# EAGLE board Transmitter PCB (EAGLE 9.6.2)
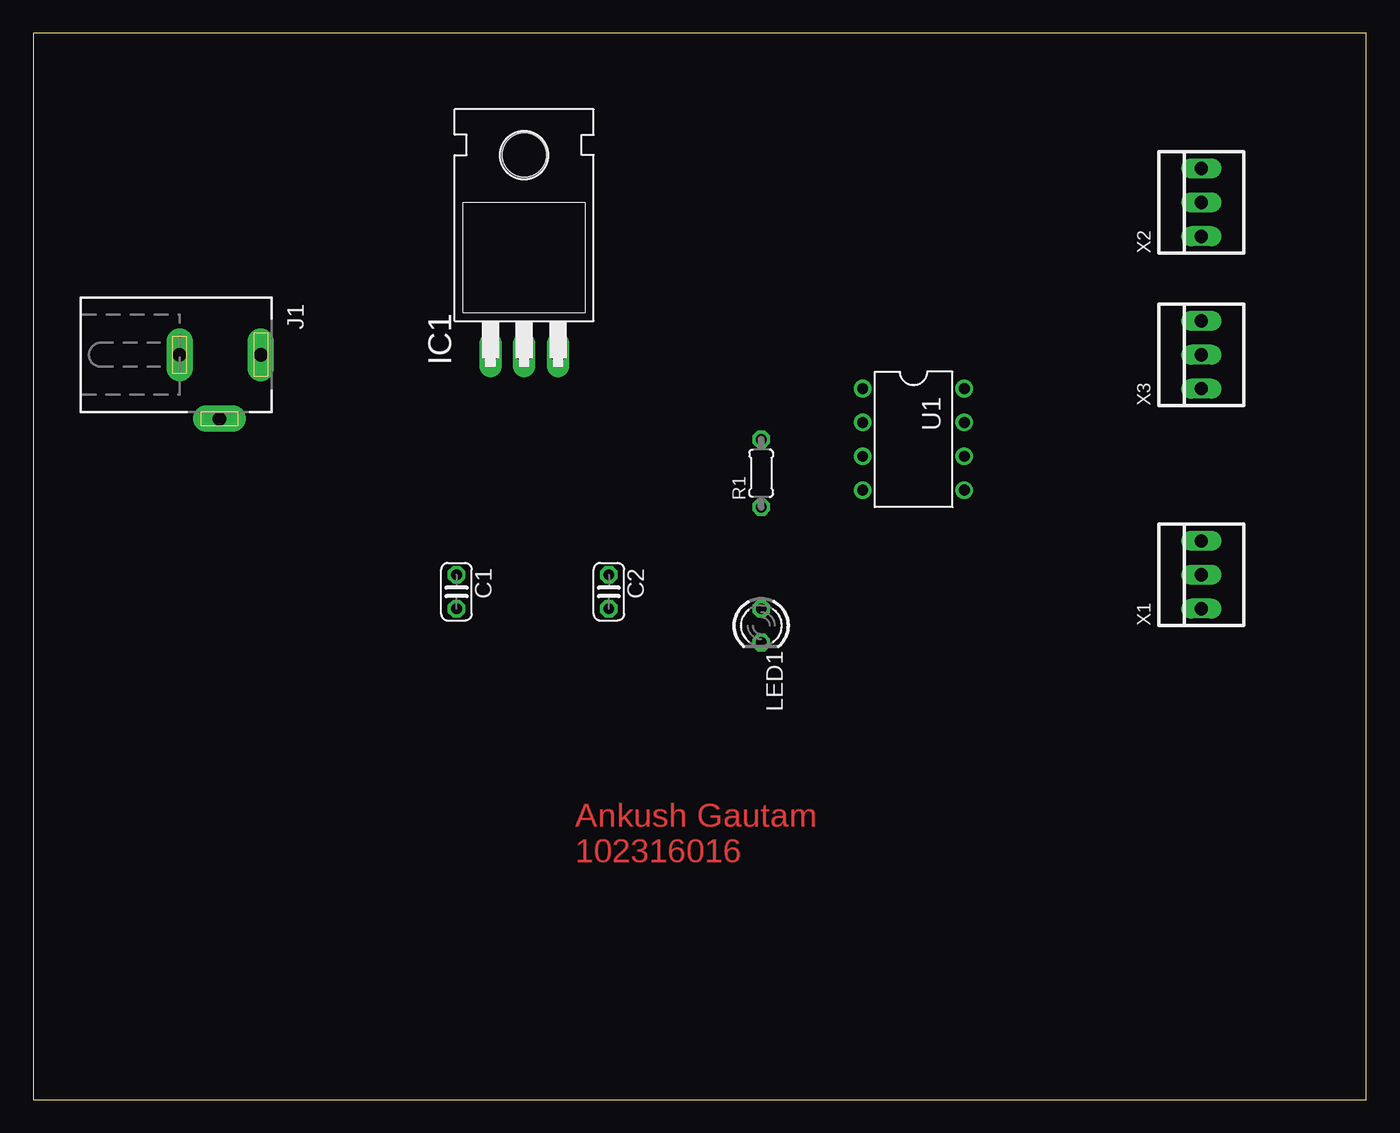
[diagram p0: board, top side]
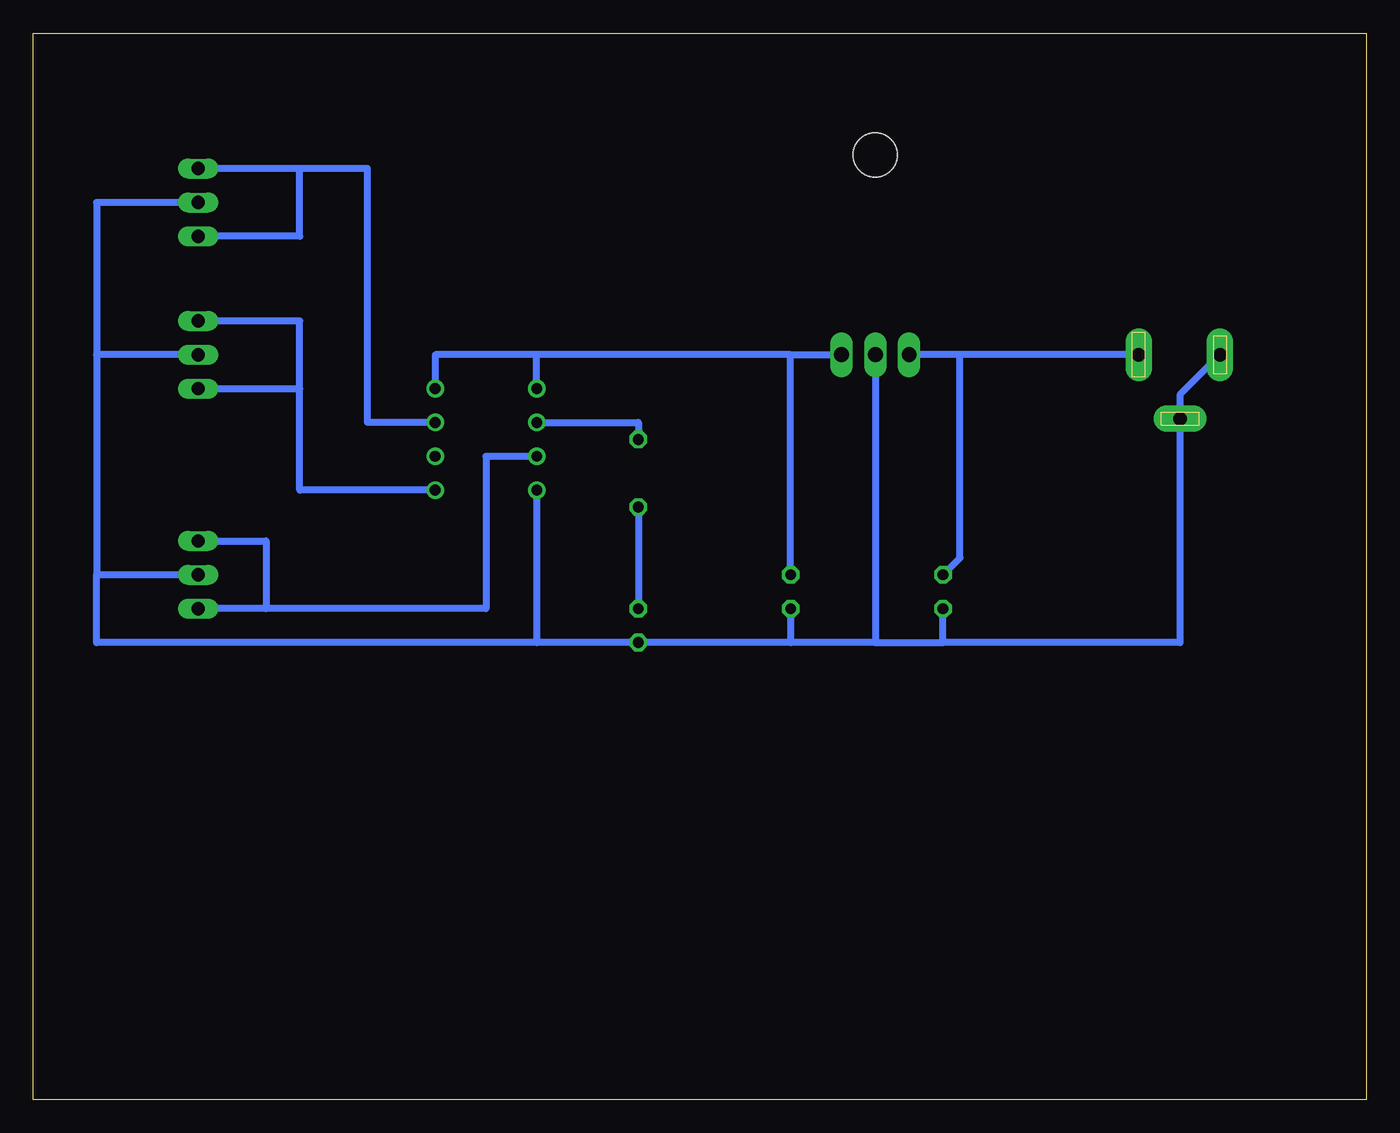
[diagram p1: board, bottom side, seen from below]

Size 100 x 80 mm. Coordinates in mm from the lower left corner, seen from the top.
Outline: 0,0 100,0 100,80 0,80 0,0
Copper layers (1*16): Top 0.035mm / dielectric 1.5mm / Bottom 0.035mm
Design rules "default": minimum track width 6mil, minimum drill 0.35mm, track to track 6mil, track to pad 6mil, pad to pad 6mil, via to via 6mil, smd to smd 6mil, copper to edge 40mil, drill to drill 6mil, minimum pad ring 10mil, minimum via ring 8mil, stop-mask expansion 4mil, vias tented up to drill 0mil, thermal gap 10mil

## Footprints (pad centres in the part's own frame; a part is rotated, then mirrored left to right if it is on the bottom)
C025-024X044 = drill 0.813 octagon: 1 -1.27,0; 2 1.27,0
TO220H = drill 1.118 long: 1 -2.54,-10.16; 2 0,-10.16; 3 2.54,-10.16 | hole 3.302: 0,4.826
DCJ0202 = drill 1 pad 2 long: 1 0,3.1; 2 4.8,0; 3 0,-3
LED3MM = drill 0.813 octagon: A -1.27,0; K 1.27,0
0204/5 = drill 0.813 octagon: 1 -2.54,0; 2 2.54,0
PDIP08_300MIL = drill 0.813: 1 -3.81,-3.81; 2 -1.27,-3.81; 3 1.27,-3.81; 4 3.81,-3.81; 5 3.81,3.81; 6 1.27,3.81; 7 -1.27,3.81; 8 -3.81,3.81
22-23-2031 = drill 1 long: 1 -2.54,0; 2 0,0; 3 2.54,0

## Placement (x,y rotation side)
C1  10uF  [C025-024X044]  31.75,38.1 270 top
C2  10pF  [C025-024X044]  43.18,38.1 270 top
IC1  7805T  [TO220H]  36.83,66.04 0 top
J1  DCJ0202  [DCJ0202]  13.97,55.88 270 top
LED1  [LED3MM]  54.61,35.56 270 top
R1  330ohm  [0204/5]  54.61,46.99 90 top
U1  ATTINY85-20P  [PDIP08_300MIL]  66.04,49.53 270 top
X1  22-23-2031  [22-23-2031]  87.63,39.37 90 top
X2  22-23-2031  [22-23-2031]  87.63,67.31 90 top
X3  22-23-2031  [22-23-2031]  87.63,55.88 90 top

## Library data of the parts
C1 C2 = rcl; SPICEPREFIX: C
IC1 = linear
J1 = con-jack; OC_FARNELL: unknown; OC_NEWARK: unknown
LED1 = led
R1 = rcl; SPICEPREFIX: R
U1 = _hhn_attiny25_45_85
X1-X3 = con-molex; MF: MOLEX; MPN: 22-23-2031; OC_FARNELL: 1462950; OC_NEWARK: 30C0862

## Nets
N$1: C1.1 IC1.1 J1.1
N$2: C1.2 C2.2 IC1.2 J1.2 J1.3 LED1.K U1.4 X1.2 X2.2 X3.2
N$3: C2.1 IC1.3 U1.1 U1.8
N$4: U1.3 X1.1 X1.3
N$5: LED1.A R1.1
N$6: U1.7 X2.1 X2.3
N$7: R1.2 U1.2
N$8: U1.5 X3.1 X3.3

## Tracks (layer width: path | path; a pad name or v marks a point on that pad's centre or on a via)
N$1
  Bottom 0.508: C1.1 30.48,40.64 30.48,55.88 | 30.48,55.88 IC1.1 | J1.1 30.48,55.88
N$2
  Bottom 0.508: J1.3 13.97,52.88 J1.2 13.97,34.29 31.75,34.29 | 31.75,34.29 C1.2 | IC1.2 36.83,34.29 | 36.83,34.29 31.75,34.29 | 36.83,34.29 43.18,34.29 | C2.2 43.18,34.29 | 43.18,34.29 LED1.K 62.23,34.29 | 62.23,34.29 95.25,34.29 95.25,39.37 | 95.25,55.88 95.25,67.31 X2.2 | 95.25,55.88 95.25,39.37 | U1.4 62.23,34.29 | X1.2 95.25,39.37 | X3.2 95.25,55.88
N$3
  Bottom 0.508: C2.1 43.18,55.88 | 43.18,55.88 IC1.3 | 43.18,55.88 62.23,55.88 | 62.23,55.88 69.85,55.88 U1.8 | U1.1 62.23,55.88
N$4
  Bottom 0.508: U1.3 66.04,48.26 66.04,36.83 82.55,36.83 | 82.55,36.83 X1.1 | X1.3 82.55,41.91 82.55,36.83
N$5
  Bottom 0.508: R1.1 LED1.A
N$6
  Bottom 0.508: U1.7 74.93,50.8 74.93,69.85 80.01,69.85 | 80.01,69.85 80.01,64.77 X2.1 | 80.01,69.85 X2.3
N$7
  Bottom 0.508: U1.2 54.61,50.8 R1.2
N$8
  Bottom 0.508: U1.5 80.01,45.72 80.01,53.34 | X3.1 80.01,53.34 | 80.01,53.34 80.01,58.42 X3.3

## Text on the board
Top: Ankush Gautam / 102316016